# Altium PCB PCB1.PcbDoc (part 1 of 2)
Units mil, origin at the board's own origin, x right, y up, seen from the top; angles counter-clockwise.
Board outline 5905 x 3937 mil, 2 copper layers (Top Layer, Bottom Layer); 159 components, 155 nets, 616 pads, 9 vias.
Unrouted connection lines stored in the file: 401.
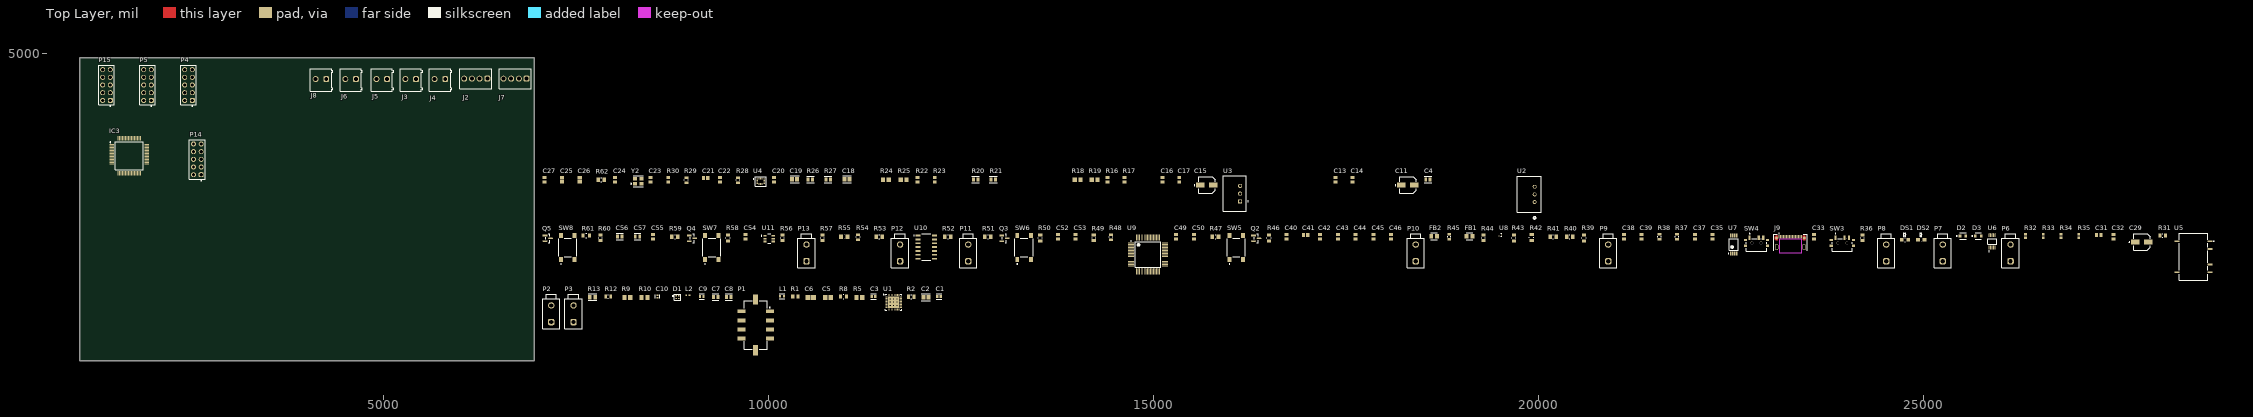
[diagram p0: Top Layer view]
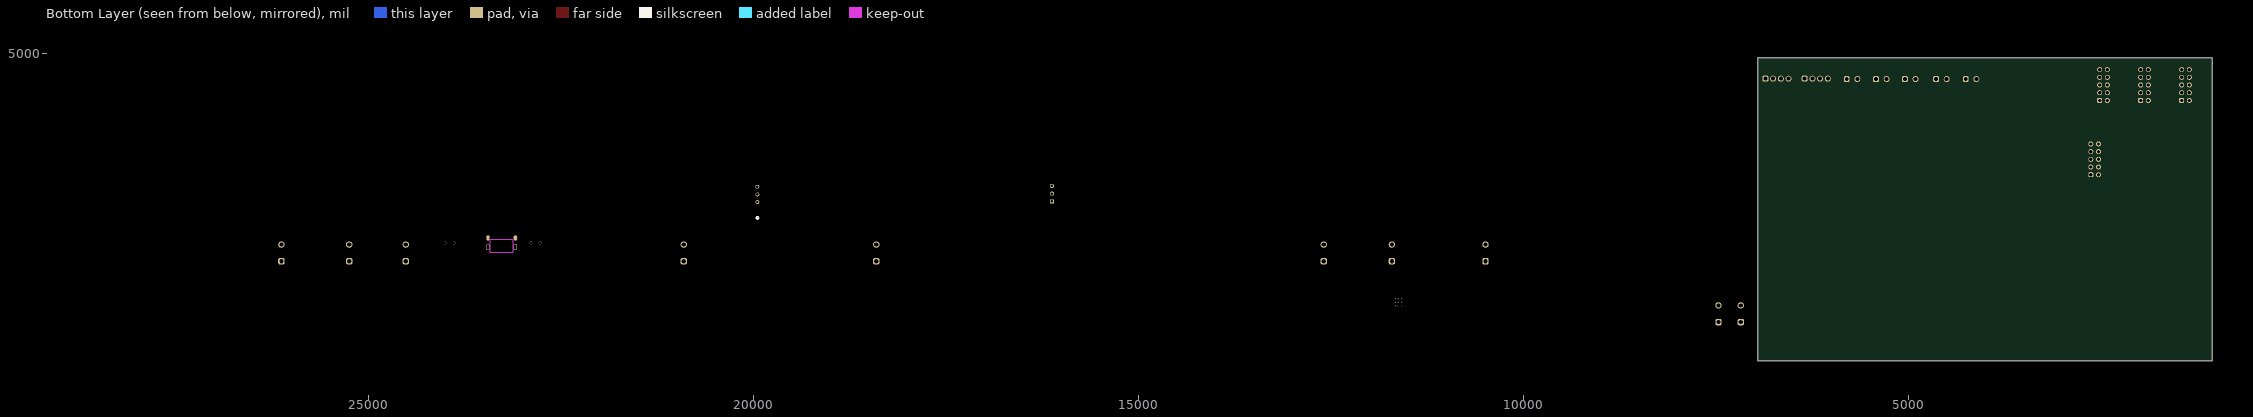
[diagram p1: Bottom Layer view, seen from below]

## Layer stack, top to bottom
Top Solder: solder mask 0.4, Solder Resist, Dk 3.5
Top Layer: signal copper 1.4
Dielectric 1: dielectric 12.6, FR-4, Dk 4.8
Bottom Layer: signal copper 1.4
Bottom Solder: solder mask 0.4, Solder Resist, Dk 3.5

## Board outline
1050,1010 1050,4947 6955,4947 6955,1010

## Design rules (kind name [scope] priority, off if disabled: settings)
Clearance [All] p1: gap=10 ignorepadtopadclearanceinfootprint=FALSE
PolygonConnect [All] p1: connectstyle=Relief reliefconductorwidth=10 reliefentries=4 polygonreliefangle="90 Angle" airgapwidth=10
RoutingVias [All] p1: holewidth=28 width=50 viastyle="Through Hole" minholewidth=28 minwidth=50 maxholewidth=28 maxwidth=50
SolderMaskExpansion [All] p1: expansion=4 istentingtop=FALSE
SupplyNets "Schematic Supply Nets_7" [InNet('5VBUS')] p1: voltage=0.000
SupplyNets "Schematic Supply Nets_6" [InNet('+12V')] p2: voltage=0.000
SupplyNets "Schematic Supply Nets_5" [InNet('VCORE')] p3: voltage=0.000
SupplyNets "Schematic Supply Nets_4" [InNet('3V3BUS')] p4: voltage=0.000
SupplyNets "Schematic Supply Nets_3" [InNet('+5V')] p5: voltage=0.000
SupplyNets "Schematic Supply Nets_2" [InNet('+3V3')] p6: voltage=0.000
SupplyNets "Schematic Supply Nets_1" [InNet('3V3AKKU')] p7: voltage=0.000
SupplyNets "Schematic Supply Nets" [InNet('GND')] p8: voltage=0.000
Width [All] p1: maxlimit=10 minlimit=10 preferedwidth=10
30 further rules are at their usual default settings.

## Classes and differential pairs
component class stm32_schematic: C4 C11 C12 C13 C14 C15 C16 C17 C18 C19 C20 C21 C22 C23 C24 C25 C26 C27 IC3 J2 J3 J4 J5 J6 J7 J8 P4 P5 P14 P15 R16 R17 R18 R19 R20 R21 R22 R23 R24 R25 R26 R27 R28 R29 R30 R62 U2 U3 U4 Y2
component class PCB_USB_UART: C29 C30 C31 C32 C33 C34 C35 C36 C37 C38 C39 C40 C41 C42 C43 C44 C45 C46 C47 C48 C49 C50 C51 C52 C53 C54 C55 C56 C57 D2 D3 DS1 DS2 FB1 FB2 J9 P6 P7 P8 P9 P10 P11 P12 P13 Q2 Q3 Q4 Q5 R31 R32 R33 R34 R35 R36 R37 R38 R39 R40 R41 R42 R43 R44 R45 R46 R47 R48 R49 R50 R51 R52 R53 R54 R55 R56 R57 R58 R59 R60 R61 SW3 SW4 SW5 SW6 SW7 SW8 U5 U6 U7 U8 U9 U10 U11 Y3
component class ESP8266_final: *1 C1 C2 C3 C5 C6 C7 C8 C9 C10 D1 IC1 IC2 J1 L1 L2 P1 P2 P3 Q1 R1 R2 R3 R4 R5 R6 R7 R8 R9 R10 R11 R12 R13 R14 R15 U1 Y1

## Components (designator, comment, footprint, x,y, rotation, side; value= is the part's Value field where it differs from the comment)
C1 "C0603C100C5GACTU" FP-C0603C-CF-MFG 12210,1845 r0 top value="10 pF"
C2 "08051C104KAT2A" FP-0805-L_2_01_0_2-W_1_25-IPC_B 12040,1835 r0 top
C3 "C0603C100C5GACTU" FP-C0603C-CF-MFG 11360,1845 r0 top value="10 pF"
C4 "GRM21BR61C106KE15L" FP-GRM21B-0_1-IPC_C 18560,3365 r0 top
C5 "C0805C105K5RACTU" CAPC2013X140X50ML20T25 10770,1830 r0 top
C6 "C0805C105K5RACTU" CAPC2013X140X50ML20T25 10545,1830 r0 top
C7 "C0805C106K8PACTU" FP-C0805C-DG-MFG 9310,1835 r0 top value=10uF
C8 "C0805C104J8RACTU" FP-C0805C-DN-MFG 9480,1835 r0 top value="0.10 μF"
C9 "C0603C829C5GACTU" FP-C0603C-CF-MFG 9130,1845 r0 top value="8.2 pF"
C10 "CBR04C249B5GAC" FP-CBR04C-MFG 8555,1845 r90 top value="2.4 pF"
C11 "EEEFK1C470UR" FP-FKC-MFG 18300,3290 r0 top
C13 "Capacitor 100 nF +/-10% 50 V 0805" CAPC2013X95X50LL10T25 17360,3360 r90 top value=100nF
C14 "Capacitor 100 nF +/-10% 50 V 0805" CAPC2013X95X50LL10T25 17580,3360 r90 top value=100nF
C15 "EEEFK1C470UR" FP-FKC-MFG 15690,3290 r0 top
C16 "Capacitor 100 nF +/-10% 50 V 0805" CAPC2013X95X50LL10T25 15110,3360 r90 top value=100nF
C17 "Capacitor 100 nF +/-10% 50 V 0805" CAPC2013X95X50LL10T25 15330,3360 r90 top value=100nF
C18 "0805ZD225KAT2A" FP-0805-L_2_01_0_2-W_1_25-IPC_B 11015,3365 r0 top
C19 "0805ZD225KAT2A" FP-0805-L_2_01_0_2-W_1_25-IPC_B 10335,3365 r0 top
C20 "Capacitor 100 nF +/-10% 50 V 0805" CAPC2013X95X50LL10T25 10065,3360 r90 top value=100nF
C21 "Capacitor 100 nF +/-10% 50 V 0805" CAPC2013X95X50LL10T25 9180,3380 r0 top value=100nF
C22 "Capacitor 100 nF +/-10% 50 V 0805" CAPC2013X95X50LL10T25 9365,3360 r90 top value=100nF
C23 "Capacitor 100 nF +/-10% 50 V 0805" CAPC2013X95X50LL10T25 8465,3360 r90 top value=100nF
C24 "Capacitor 100 nF +/-10% 50 V 0805" CAPC2013X95X50LL10T25 8005,3360 r90 top value=100nF
C25 "08055A150JAT2A" CAPC2013X140X50LL20T25 7315,3360 r90 top
C26 "08055A150JAT2A" CAPC2013X140X50LL20T25 7545,3360 r90 top
C27 "Capacitor 100 nF +/-10% 50 V 0805" CAPC2013X95X50LL10T25 7085,3360 r90 top value=100nF
C29 "EEEFK1C470UR" FP-FKC-MFG 27830,2550 r0 top
C31 "Capacitor 100 nF +/-10% 50 V 0805" CAPC2013X95X50LL10T25 27270,2640 r0 top value=100nF
C32 "Capacitor 100 nF +/-10% 50 V 0805" CAPC2013X95X50LL10T25 27460,2620 r90 top value=100nF
C33 "Capacitor 100 nF +/-10% 50 V 0805" CAPC2013X95X50LL10T25 23570,2620 r90 top value=100nF
C35 "Capacitor 100 nF +/-10% 50 V 0805" CAPC2013X95X50LL10T25 22255,2620 r90 top value=100nF
C37 "Capacitor 100 nF +/-10% 50 V 0805" CAPC2013X95X50LL10T25 22025,2620 r90 top value=100nF
C38 "Capacitor 100 nF +/-10% 50 V 0805" CAPC2013X95X50LL10T25 21105,2620 r90 top value=100nF
C39 "Capacitor 100 nF +/-10% 50 V 0805" CAPC2013X95X50LL10T25 21335,2620 r90 top value=100nF
C40 "Capacitor 100 nF +/-10% 50 V 0805" CAPC2013X95X50LL10T25 16720,2620 r90 top value=100nF
C41 "Capacitor 100 nF +/-10% 50 V 0805" CAPC2013X95X50LL10T25 16970,2640 r0 top value=100nF
C42 "Capacitor 100 nF +/-10% 50 V 0805" CAPC2013X95X50LL10T25 17160,2620 r90 top value=100nF
C43 "Capacitor 100 nF +/-10% 50 V 0805" CAPC2013X95X50LL10T25 17390,2620 r90 top value=100nF
C44 "Capacitor 100 nF +/-10% 50 V 0805" CAPC2013X95X50LL10T25 17620,2620 r90 top value=100nF
C45 "Capacitor 100 nF +/-10% 50 V 0805" CAPC2013X95X50LL10T25 17850,2620 r90 top value=100nF
C46 "Capacitor 100 nF +/-10% 50 V 0805" CAPC2013X95X50LL10T25 18080,2620 r90 top value=100nF
C49 "Capacitor 100 nF +/-10% 50 V 0805" CAPC2013X95X50LL10T25 15290,2620 r90 top value=100nF
C50 "Capacitor 100 nF +/-10% 50 V 0805" CAPC2013X95X50LL10T25 15520,2620 r90 top value=100nF
C52 "Capacitor 100 nF +/-10% 50 V 0805" CAPC2013X95X50LL10T25 13755,2620 r90 top value=100nF
C53 "Capacitor 100 nF +/-10% 50 V 0805" CAPC2013X95X50LL10T25 13985,2620 r90 top value=100nF
C54 "Capacitor 100 nF +/-10% 50 V 0805" CAPC2013X95X50LL10T25 9700,2620 r90 top value=100nF
C55 "Capacitor 100 nF +/-10% 50 V 0805" CAPC2013X95X50LL10T25 8495,2620 r90 top value=100nF
C56 "C0805C270J5GACTU" FP-C0805C-DN-MFG 8065,2625 r0 top value="27 pF"
C57 "C0805C270J5GACTU" FP-C0805C-DN-MFG 8295,2625 r0 top value="27 pF"
D1 "SML-LX0404SIUPGUSB" FP-SML-LX0404SIUPGUSB-MFG 8815,1835 r0 top
D2 "SML-LXT0805IW-TR" FP-SML-LXT0805IW-TR-MFG 25505,2630 r0 top
D3 "SML-LXT0805IW-TR" FP-SML-LXT0805IW-TR-MFG 25705,2630 r0 top
DS1 "SML-LXT0805GW-TR" LUMX-SML-LXT0805_V 24755,2580 r0 top
DS2 "SML-LXT0805GW-TR" LUMX-SML-LXT0805_V 24965,2580 r0 top
FB1 "HZ0805E601R-10" FP-HZ0805-MFG 19100,2625 r0 top
FB2 "HZ0805E601R-10" FP-HZ0805-MFG 18640,2625 r0 top
IC3 "STM32H7A3RIT6" QFP50P1200X1200X160-64N 1695,3670 r0 top
J2 "691210910004" 691210910004 6195,4672.72 r180 top
J3 "691214110002" 691214110002 5350,4655 r180 top
J4 "691214110002" 691214110002 5730,4655 r180 top
J5 "691214110002" 691214110002 4975,4655 r180 top
J6 "691214110002" 691214110002 4570,4655 r180 top
J7 "691210910004" 691210910004 6705,4672.72 r180 top
J8 "691214110002" 691214110002 4185,4655 r180 top
J9 "213083-0005" FP-2130830005-MFG 23265,2480 r0 top
L1 "LQW18AN4N3C00D" FP-LQW18AN_00-MFG 10170,1845 r0 top
L2 "7447840015G" WE-MK_0402_L1W0.5H0.5 8950,1860 r0 top
P1 "662008231822" 662008231822 9830,1475 r90 top
P2 "64900221122" 64900221122 7175,1620 r0 top
P3 "64900221122" 64900221122 7465,1620 r0 top
P4 "61301021121" 61301021121 2465,4590 r90 top
P5 "61301021121" 61301021121 1932.5,4590 r90 top
P6 "64900221122" 64900221122 26125,2410 r0 top
P7 "64900221122" 64900221122 25245,2410 r0 top
P8 "64900221122" 64900221122 24510,2410 r0 top
P9 "64900221122" 64900221122 20900,2410 r0 top
P10 "64900221122" 64900221122 18400,2410 r0 top
P11 "64900221122" 64900221122 12590,2410 r0 top
P12 "64900221122" 64900221122 11705,2410 r0 top
P13 "64900221122" 64900221122 10490,2410 r0 top
P14 "61301021121" 61301021121 2580,3625 r90 top
P15 "61301021121" 61301021121 1400,4590 r90 top
Q2 "BSS138" FP-318-08-IPC_B 16330,2600 r0 top
Q3 "BSS138" FP-318-08-IPC_B 13060,2600 r0 top
Q4 "BSS138" FP-318-08-IPC_B 9005,2600 r0 top
Q5 "BSS138" FP-318-08-IPC_B 7130,2600 r0 top
R1 "TNPW0805499RBEEN" RESC2013X55X40NL15T20 10345,1845 r0 top
R2 "CRCW0805200RFKEA" RESC2013X50X30NL20T20 11850,1840 r0 top
R5 "ERJ6ENF1202V" RESC2013X70X40ML20T20 11175,1830 r0 top
R8 "RN73C2A12KBTG" FP-RN732A-MFG 10970,1845 r0 top value=12KΩ
R9 "ERA6AEB101V" RESC2013X60X40ML20T25 8165,1830 r0 top
R10 "ERJ-6ENF24R9V" RESC2013X70X40ML20T20 8385,1830 r0 top
R12 "CRCW080522R0FKEA" FP-CRCW0805-e3-IPC_C 7915,1845 r0 top
R13 "ERJ-6ENF4990V" FP-ERJ6EN-IPC_B 7710,1835 r0 top
R16 "ERA-6AEB103V" RESC2013X60X40LL20T25_A 14400,3360 r90 top
R17 "ERA-6AEB103V" RESC2013X60X40LL20T25_A 14620,3360 r90 top
R18 "ERA6AEB472V" RESC2013X60X40ML20T25 14010,3360 r0 top
R19 "ERA6AEB472V" RESC2013X60X40ML20T25 14230,3360 r0 top
R20 "ERA6AEB102V" FP-ERA6A-IPC_C 12685,3365 r0 top
R21 "ERA6AEB102V" FP-ERA6A-IPC_C 12915,3365 r0 top
R22 "ERA-6AEB103V" RESC2013X60X40LL20T25_A 11930,3360 r90 top
R23 "ERA-6AEB103V" RESC2013X60X40LL20T25_A 12155,3360 r90 top
R24 "ERA6AEB472V" RESC2013X60X40ML20T25 11520,3360 r0 top
R25 "ERA6AEB472V" RESC2013X60X40ML20T25 11750,3360 r0 top
R26 "ERA6AEB102V" FP-ERA6A-IPC_C 10540,3365 r0 top
R27 "ERA6AEB102V" FP-ERA6A-IPC_C 10770,3365 r0 top
R28 "CRCW080568R0FKEA" FP-CRCW0805-e3-IPC_C 9600,3355 r90 top
R29 "CRCW080568R0FKEA" FP-CRCW0805-e3-IPC_C 8930,3355 r90 top
R30 "ERA-6AEB103V" RESC2013X60X40LL20T25_A 8695,3360 r90 top
R31 "RC0805FR-0710KL" RESC2013X60X35NL10T20 28100,2635 r0 top
R32 "ERA3AEB680V" RESC1608X55X30LL20T20 26320,2630 r90 top
R33 "ERA3AEB680V" RESC1608X55X30LL20T20 26550,2630 r90 top
R34 "ERA3AEB680V" RESC1608X55X30LL20T20 26780,2630 r90 top
R35 "ERA3AEB680V" RESC1608X55X30LL20T20 27010,2630 r90 top
R36 "RC0805FR-0710KL" RESC2013X60X35NL10T20 24200,2605 r90 top
R37 "CRCW08054K30FKEA" RESC2013X50X30LL20T20 21795,2620 r90 top
R38 "RC0805FR-07470RL" RESC2013X60X35LL10T20 21565,2620 r90 top
R39 "RN73C2A5K11BTDF" FP-RN732A-MFG 20585,2605 r90 top value=5.11KΩ
R40 "RC0805JR-070RL" RESC2013X60X35ML10T20 20400,2620 r0 top
R41 "RC0805JR-070RL" RESC2013X60X35ML10T20 20185,2620 r0 top
R42 "CRCW08051K50FKEA" FP-CRCW0805-e3-MFG 19905,2610 r90 top
R43 "RN73C2A5K11BTDF" FP-RN732A-MFG 19675,2605 r90 top value=5.11KΩ
R44 "RC0805FR-0710KL" RESC2013X60X35NL10T20 19280,2605 r90 top
R45 "RC0805FR-07470RL" RESC2013X60X35LL10T20 18835,2620 r90 top
R46 "RN73C2A100RBTDF" FP-RN732A-MFG 16495,2605 r90 top value=100Ω
R47 "RC0805JR-070RL" RESC2013X60X35ML10T20 15800,2620 r0 top
R48 "CRCW080568R0FKEA" FP-CRCW0805-e3-IPC_C 14445,2615 r90 top
R49 "RC0805FR-0710KL" RESC2013X60X35NL10T20 14220,2605 r90 top
R50 "RN73C2A100RBTDF" FP-RN732A-MFG 13525,2605 r90 top value=100Ω
R51 "RC0805FR-0710RL" RESC2013X60X35ML10T20 12845,2620 r0 top
R52 "RC0805FR-0710RL" RESC2013X60X35ML10T20 12325,2620 r0 top
R53 "RC0805FR-071KL" RESC2013X60X35ML10T20 11435,2620 r0 top
R54 "CRCW080568R0FKEA" FP-CRCW0805-e3-IPC_C 11160,2615 r90 top
R55 "CRCW080512K0FKEA" FP-CRCW0805-e3-IPC_A 10980,2620 r0 top
R56 "RC0805FR-0710KL" RESC2013X60X35NL10T20 10180,2605 r90 top
R57 "RC0805FR-0710KL" RESC2013X60X35NL10T20 10700,2605 r90 top
R58 "RN73C2A100RBTDF" FP-RN732A-MFG 9470,2605 r90 top value=100Ω
R59 "RC0805JR-072KL" RESC2013X60X35ML10T20 8780,2620 r0 top
R60 "RC0805FR-0710KL" RESC2013X60X35NL10T20 7815,2605 r90 top
R61 "RN73C2A100RBTDF" FP-RN732A-MFG 7630,2635 r0 top value=100Ω
R62 "Resistor 0R +/- 5% 0805 125 mW" RESC2013X60X35ML10T20 7825,3360 r0 top value=0
SW3 "PCM12SMTR" FP-PCM12SMTR-MFG 23940,2510 r0 top
SW4 "PCM12SMTR" FP-PCM12SMTR-MFG 22825,2510 r0 top
SW5 "PTS645SM43SMTR92LFS" FP-PTS645SM43SMTR92LFS-MFG 16070,2480 r90 top
SW6 "PTS645SM43SMTR92LFS" FP-PTS645SM43SMTR92LFS-MFG 13315,2480 r90 top
SW7 "PTS645SM43SMTR92LFS" FP-PTS645SM43SMTR92LFS-MFG 9260,2480 r90 top
SW8 "PTS645SM43SMTR92LFS" FP-PTS645SM43SMTR92LFS-MFG 7390,2480 r90 top
U1 "ESP8266EX" ESFS-QFN-32_L 11620,1770 r0 top
U2 "TSR 1-2433" TSR1-SINGLE_TRP 19945,3070 r90 top
U3 "TSR 1-2450" TRACO-SIP-3_V 16120,3180 r90 top
U4 "LSM6DSOXTR" FP-LGA-14L-DM00249496-MFG 9895,3340 r0 top
U5 "TSRN 1-2433SM" TSR(N 28500,2360 r0 top
U6 "TS5A23157DGSR" FP-DGS0010A-IPC_C 25885,2560 r90 top
U7 "TPS2113APW" PW0008A_N 22530,2520 r90 top
U8 "TPD2EUSB30DRTR" DRT0003A 19500,2645 r0 top
U9 "FT2232HL-Reel" LQFP-64_M 14925,2390 r0 top
U10 "SN74LVC14AD" FP-D0014A-MFG 12045,2485 r0 top
U11 "93LC56BT-I/OT" FP-C04-028-MFG 10005,2595 r0 top
Y2 "ABM8AIG-24.000MHZ-12-2Z-T3" FP-ABM8AIG-MFG 8305,3340 r0 top

## Footprints (in the part's own frame and the unit in brackets; to place one, negate y for a bottom-side part, rotate by r counter-clockwise, add the part's x,y. Pads: shape width x height; smd on the part's side, far side on the other; paste and mask are expansions set on the pad)
61301021121 [mm] "Pin Header, pitch 2.54 mm, THT, Vertical, dual row, 10p"
  rrect50% 1.65x1.65 hole 1.1: 1(-5.08,-1.27)
  round 1.65 hole 1.1: 2(-5.08,1.27) 3(-2.54,-1.27) 4(-2.54,1.27) 5(0,-1.27) 6(0,1.27) 7(2.54,-1.27) 8(2.54,1.27) 9(5.08,-1.27) 10(5.08,1.27)
  silkscreen extent -7.08,-2.62 6.5,2.62, body extent -6.35,-2.54 6.35,2.54, height 8.59
64900221122 [mm] "4.20mm Male Dual Row Vertical Header, 2p"
  rrect50% 2.1x2.1 hole 1.4: 1(0,-2.75)
  round 2.1 hole 1.4: 2(0,2.75)
  silkscreen extent -2.85,-4.9 2.85,6.4, body extent -2.7,-4.8 3.1,6.3, height 12.85
662008231822 [mm] "3.00mm SMT Male Dual Row Vertical Header with SMT Solder Tab, 8p"
  rect 1.27x2.54 smd: 1(4.5,-4.7) 2(1.5,-4.7) 3(-1.5,-4.7) 4(-4.5,-4.7) 5(4.5,4.7) 6(1.5,4.7) 7(-1.5,4.7) 8(-4.5,4.7)
  rect 3.43x1.65 smd: MP1(-8.395,0) MP2(8.395,0)
  silkscreen extent -8,-4.75 8,3.76, body extent -10.1,-5.7 10.1,5.7, height 9.93
691210910004 [mm] "2,54mm - modular - green - Horizontal wire entry - Cage clamp - 0,8mm2 wires - 04p"
  rrect50% 1.95x1.95 hole 1.3: 1(-3.81,0)
  round 1.95 hole 1.3: 2(-1.27,0) 3(1.27,0) 4(3.81,0)
  silkscreen extent -5.28,-3.25 5.28,3.25, body extent -5.28,-3.25 5.28,3.25, height 8.55
691214110002 [mm] "3.50 mm Horizontal Entry Modular, 2p"
  rrect50% 1.95x1.95 hole 1.3: 1(-1.75,-0.3)
  round 1.95 hole 1.3: 2(1.75,-0.3)
  silkscreen extent -3.9,-3.7 3.5,3.7, body extent -3.95,-3.7 3.5,3.7, height 8.55
CAPC2013X95X50LL10T25 [mm] "Chip Capacitor, 2-Leads, Body 2.10x1.35mm, IPC High Density"
  rect 1.05x1.3 smd: 1(-0.725,0) 2(0.725,0)
  body extent -1.05,-0.67 1.05,0.67, height 0.95
CAPC2013X140X50LL20T25 [mm] "Chip Capacitor, 2-Leads, Body 2.00x1.25mm, IPC High Density"
  rect 1.1x1.35 smd: 1(-0.7,0) 2(0.7,0)
  body extent -1.1,-0.72 1.1,0.72, height 1.4
CAPC2013X140X50ML20T25 [mm] "Chip Capacitor, 2-Leads, Body 2.00x1.25mm, IPC Low Density"
  rect 1.5x1.55 smd: 1(-0.9,0) 2(0.9,0)
  body extent -1.1,-0.72 1.1,0.72, height 1.4
DRT0003A [mm] "SOTFL, 3-Leads, Body 1x1mm (inc leads), Pitch 0.35mm"
  rrect33% 0.3x0.3 smd: 1(-0.425,0.35) 2(-0.425,-0.35) 3(0.425,0)
  silkscreen extent 0.13,-0.55 0.43,0.55, body extent -0.5,-0.5 0.5,0.5, height 0.5
ESFS-QFN-32_L [mm] "QFN, 32-Leads, Body 5.05x5.05mm, Pitch 0.50mm, Thermal Pad 3.70x3.70mm, IPC High Density"
  oval 0.7x0.25 smd: 1(-2.375,1.75) 2(-2.375,1.25) 3(-2.375,0.75) 4(-2.375,0.25) 5(-2.375,-0.25) 6(-2.375,-0.75) 7(-2.375,-1.25) 8(-2.375,-1.75) 17(2.375,-1.75) 18(2.375,-1.25) 19(2.375,-0.75) 20(2.375,-0.25) 21(2.375,0.25) 22(2.375,0.75) 23(2.375,1.25) 24(2.375,1.75)
  oval 0.25x0.7 smd: 9(-1.75,-2.375) 10(-1.25,-2.375) 11(-0.75,-2.375) 12(-0.25,-2.375) 13(0.25,-2.375) 14(0.75,-2.375) 15(1.25,-2.375) 16(1.75,-2.375) 25(1.75,2.375) 26(1.25,2.375) 27(0.75,2.375) 28(0.25,2.375) 29(-0.25,2.375) 30(-0.75,2.375) 31(-1.25,2.375) 32(-1.75,2.375)
  rect 3.7x3.7 smd: 33(0,0)
  silkscreen extent -3.45,-2.67 2.68,2.68, body extent -2.52,-2.52 2.53,2.53, height 0.9
FP-318-08-IPC_B [mm]
  rect 1.524x0.578 smd paste+0 mask+0: 1(-0.91,0.95)
  rrect100% 1.524x0.578 smd paste+0 mask+0: 2(-0.91,-0.95) 3(0.91,0)
  silkscreen extent -0.65,-1.45 0.65,1.45, body extent -1.92,-1.7 1.92,1.7, height 0.25
FP-0805-L_2_01_0_2-W_1_25-IPC_B [mil]
  rect 51.36x57.33 smd paste+0 mask+0: 1(-31.72,0) 2(31.72,0)
  silkscreen extent -57,-44 57,44, body extent -67,-39 67,39, height 10
FP-2130830005-MFG [mm]
  round 0.9 smd paste-1000 mask+0: 1(-4.57,3.15) 2(4.57,3.15)
  rrect100% 1.1x1.65 smd far side paste-1000 mask+0: 1(-4.52,3.15) 2(4.52,3.15)
  rrect100% 1.1x2.05 hole 1.55 slot 0.6 at 0 deg paste-2539.97 mask+0: 3(-4.52,0.15) 4(4.52,0.15)
  rect 0.3x1 smd paste+0 mask+0: A1(-3.75,3.55) A4(-2.75,3.55) A5(-1.75,3.55) A6(-0.75,3.55) A7(0.75,3.55) A8(1.75,3.55) A9(2.75,3.55) A12(3.75,3.55) B1(3.25,3.55) B4(2.25,3.55) B5(1.25,3.55) B6(0.25,3.55) B7(-0.25,3.55) B8(-1.25,3.55) B9(-2.25,3.55) B12(-3.25,3.55)
  Top Layer region: 5.07,3.425 5.001,3.691 4.812,3.891 4.549,3.974 4.28,3.919 4.07,3.741 4.07,3.741 4.07,2.559 4.28,2.381 4.549,2.326 4.812,2.409 5.001,2.609 5.07,2.875 5.07,2.875
  Top Layer region: -5.07,3.425 -5.001,3.691 -4.812,3.891 -4.549,3.974 -4.28,3.919 -4.07,3.741 -4.07,3.741 -4.07,2.559 -4.28,2.381 -4.549,2.326 -4.812,2.409 -5.001,2.609 -5.07,2.875 -5.07,2.875
  Keep-Out Layer region: -3.7,-1.745 3.7,-1.745 3.7,2.755 -3.7,2.755
  silkscreen extent -5.53,-1.07 5.53,4.75, body extent -5.33,-4.18 5.33,4.18, height 0.25
FP-ABM8AIG-MFG [mm]
  rect 1.4x1.2 smd paste+0 mask+0: 1(-1.1,-0.8) 2(1.1,-0.8) 3(1.1,0.8) 4(-1.1,0.8)
  silkscreen extent -2.47,-1.8 1.65,1.8, body extent -1.9,-1.5 1.9,1.5, height 0.25
FP-C04-028-MFG [mm]
  rect 1.1x0.6 smd paste+0 mask+0: 1(-1.4,0.95) 2(-1.4,0) 3(-1.4,-0.95) 4(1.4,-0.95) 5(1.4,0) 6(1.4,0.95)
  silkscreen extent -2.65,-1.55 0.48,1.55, body extent -2.05,-1.88 2.05,1.88, height 0.25
FP-C0603C-CF-MFG [mm]
  rect 0.75x0.9 smd paste+0 mask+0: 1(-0.6,0) 2(0.6,0)
  silkscreen extent -0.87,-0.85 0.88,0.85, body extent -1.2,-0.6 1.2,0.6, height 0.25
FP-C0805C-DG-MFG [mm]
  rect 0.95x1.35 smd paste+0 mask+0: 1(-0.75,0) 2(0.75,0)
  silkscreen extent -1.11,-1.08 1.1,1.07, body extent -1.4,-0.85 1.4,0.85, height 0.25
FP-C0805C-DN-MFG [mm]
  rect 0.95x1.35 smd paste+0 mask+0: 1(-0.75,0) 2(0.75,0)
  silkscreen extent -1.1,-1.07 1.1,1.07, body extent -1.4,-0.85 1.4,0.85, height 0.25
FP-CBR04C-MFG [mm]
  rect 0.52x0.52 smd paste+0 mask+0: 1(-0.4,0) 2(0.4,0)
  silkscreen extent -0.53,-0.68 0.53,0.67, body extent -0.8,-0.4 0.8,0.4, height 0.25
FP-CRCW0805-e3-IPC_A [mil]
  rect 47.5x59.38 smd paste+0 mask+0: 1(-41.37,0) 2(41.37,0)
  silkscreen extent -3,-25 3,25, body extent -85,-49 85,49, height 10
FP-CRCW0805-e3-IPC_C [mil]
  rect 31.75x51.5 smd paste+0 mask+0: 1(-33.5,0) 2(33.5,0)
  silkscreen extent -3,-25 3,25, body extent -53,-31 53,31, height 10
FP-CRCW0805-e3-MFG [mm]
  rect 0.95x1.45 smd paste+0 mask+0: 1(-0.975,0) 2(0.975,0)
  silkscreen extent -0.13,-0.7 0.13,0.7, body extent -1.55,-0.82 1.55,0.82, height 0.25
FP-D0014A-MFG [mm]
  rect 1.55x0.6 smd paste-1000 mask+0: 1(-2.7,3.81) 2(-2.7,2.54) 3(-2.7,1.27) 4(-2.7,0) 5(-2.7,-1.27) 6(-2.7,-2.54) 7(-2.7,-3.81) 8(2.7,-3.81) 9(2.7,-2.54) 10(2.7,-1.27) 11(2.7,0) 12(2.7,1.27) 13(2.7,2.54) 14(2.7,3.81)
  silkscreen extent -4.15,-4.38 1.55,4.38, body extent -3.57,-4.62 3.57,4.62, height 0.25
FP-DGS0010A-IPC_C [mm]
  rect 1.257x0.312 smd paste+0 mask+0: 1(-2.051,1)
  rrect100% 1.257x0.312 smd paste+0 mask+0: 2(-2.051,0.5) 3(-2.051,0) 4(-2.051,-0.5) 5(-2.051,-1) 6(2.051,-1) 7(2.051,-0.5) 8(2.051,0) 9(2.051,0.5) 10(2.051,1)
  silkscreen extent -3.38,-1.5 0.92,1.5
FP-ERA6A-IPC_C [mil]
  rect 39.55x49.69 smd paste+0 mask+0: 1(-29.56,0) 2(29.56,0)
  silkscreen extent -49,-42 49,42, body extent -53,-31 53,31, height 10
FP-ERJ6EN-IPC_B [mil]
  rect 45.47x53.63 smd paste+0 mask+0: 1(-34.47,0) 2(34.47,0)
  silkscreen extent -57,-43 57,43
FP-FKC-MFG [mm]
  rect 2.8x1.6 smd paste+0 mask+0: 1(-2.15,0) 2(2.15,0)
  silkscreen extent -4.25,-2.75 2.76,2.75, body extent -3.8,-3 3.8,3, height 0.25
FP-GRM21B-0_1-IPC_C [mil]
  rect 37.71x49.69 smd paste+0 mask+0: 1(-28.63,0) 2(28.63,0)
  silkscreen extent -47,-42 47,42, body extent -51,-31 51,31, height 10
FP-HZ0805-MFG [mm]
  rect 1.285x1.47 smd paste+0 mask+0: 1(-0.972,0) 2(0.972,0)
  silkscreen extent -1.1,-1.15 1.1,1.15, body extent -1.72,-0.83 1.72,0.83, height 0.25
FP-LGA-14L-DM00249496-MFG [mm]
  rect 0.575x0.35 smd paste+0 mask+0: 1(-1.162,0.75) 2(-1.162,0.25) 3(-1.162,-0.25) 4(-1.162,-0.75) 8(1.162,-0.75) 9(1.162,-0.25) 10(1.162,0.25) 11(1.162,0.75)
  rect 0.35x0.575 smd paste+0 mask+0: 5(-0.5,-0.913) 6(0,-0.913) 7(0.5,-0.913) 12(0.5,0.913) 13(0,0.913) 14(-0.5,0.913)
  silkscreen extent -2.5,-1.58 1.83,1.58, body extent -2.05,-1.8 2.05,1.8, height 0.25
FP-LQW18AN_00-MFG [mm]
  rect 0.625x0.85 smd paste+0 mask+0: 1(-0.663,0) 2(0.663,0)
  silkscreen extent -0.9,-0.82 0.9,0.82, body extent -1.07,-0.6 1.07,0.6, height 0.25
FP-PCM12SMTR-MFG [mm]
  rect 0.7x1.5 smd paste+0 mask+0: 1(-2.25,2.5) 2(0.75,2.5) 3(2.25,2.5)
  rect 1x0.8 smd paste+0 mask+0: 4(-3.65,1.715) 5(3.65,1.715) 6(-3.65,-0.215) 7(3.65,-0.215)
  round 0.9 hole 0.9 unplated paste-2539.97 mask+0: ""(-1.5,0.75) ""(1.5,0.75)
  silkscreen extent -3.35,-2.05 3.35,3.95, body extent -4.25,-2.15 4.25,3.35, height 0.25
FP-PTS645SM43SMTR92LFS-MFG [mm]
  rect 1.55x1.3 smd paste+0 mask+0: 1(-3.975,2.25) 2(3.975,2.25) 3(-3.975,-2.25) 4(3.975,-2.25)
  silkscreen extent -5.52,-3 3,3, body extent -4.85,-3.1 4.85,3.1, height 0.25
FP-RN732A-MFG [mm]
  rect 1x1.35 smd paste+0 mask+0: 1(-1,0) 2(1,0)
  silkscreen extent -0.13,-0.7 0.13,0.7, body extent -1.6,-0.8 1.6,0.8, height 0.25
FP-SML-LX0404SIUPGUSB-MFG [mm]
  rect 0.45x0.45 smd paste+0 mask+0: 1(-0.425,0.425) 2(0.425,0.425) 3(0.425,-0.425) 4(-0.425,-0.425)
  silkscreen extent -1.67,-1.05 1.05,1.05, body extent -0.85,-0.85 0.85,0.85, height 0.25
FP-SML-LXT0805IW-TR-MFG [mm]
  rect 0.9x1.1 smd paste+0 mask+0: 1(-0.95,0) 2(0.95,0)
  silkscreen extent -2.1,-1 1.05,1, body extent -1.5,-0.8 1.5,0.8, height 0.25
LQFP-64_M [mm] "Thin QFP, 64-Leads, Body 10x10mm, Pitch 0.5mm, IPC Low Density"
  oval 2.1x0.3 smd: 1(-5.6,3.75) 2(-5.6,3.25) 3(-5.6,2.75) 4(-5.6,2.25) 5(-5.6,1.75) 6(-5.6,1.25) 7(-5.6,0.75) 8(-5.6,0.25) 9(-5.6,-0.25) 10(-5.6,-0.75) 11(-5.6,-1.25) 12(-5.6,-1.75) 13(-5.6,-2.25) 14(-5.6,-2.75) 15(-5.6,-3.25) 16(-5.6,-3.75) 33(5.6,-3.75) 34(5.6,-3.25) 35(5.6,-2.75) 36(5.6,-2.25) 37(5.6,-1.75) 38(5.6,-1.25) 39(5.6,-0.75) 40(5.6,-0.25) 41(5.6,0.25) 42(5.6,0.75) 43(5.6,1.25) 44(5.6,1.75) 45(5.6,2.25) 46(5.6,2.75) 47(5.6,3.25) 48(5.6,3.75)
  oval 0.3x2.1 smd: 17(-3.75,-5.6) 18(-3.25,-5.6) 19(-2.75,-5.6) 20(-2.25,-5.6) 21(-1.75,-5.6) 22(-1.25,-5.6) 23(-0.75,-5.6) 24(-0.25,-5.6) 25(0.25,-5.6) 26(0.75,-5.6) 27(1.25,-5.6) 28(1.75,-5.6) 29(2.25,-5.6) 30(2.75,-5.6) 31(3.25,-5.6) 32(3.75,-5.6) 49(3.75,5.6) 50(3.25,5.6) 51(2.75,5.6) 52(2.25,5.6) 53(1.75,5.6) 54(1.25,5.6) 55(0.75,5.6) 56(0.25,5.6) 57(-0.25,5.6) 58(-0.75,5.6) 59(-1.25,5.6) 60(-1.75,5.6) 61(-2.25,5.6) 62(-2.75,5.6) 63(-3.25,5.6) 64(-3.75,5.6)
  silkscreen extent -5.72,-4.15 4.15,4.57, body extent -5,-5 5,5, height 1.6
LUMX-SML-LXT0805_V [mm] "SMD, 2-Leads, Body 2x1.25mm"
  rect 1.2x1.2 smd: 1(-1.05,0) 2(1.05,0)
  silkscreen extent -0.41,-0.63 0.23,2.25, body extent -1,-0.63 1,0.63, height 0.8
PW0008A_N [mm] "SOP, 8-Leads, Body 4.5x3.1mm, Pitch 0.65mm, IPC Medium Density"
  rrect22% 1.4x0.45 smd: 1(-2.95,0.975) 2(-2.95,0.325) 3(-2.95,-0.325) 4(-2.95,-0.975) 5(2.95,-0.975) 6(2.95,-0.325) 7(2.95,0.325) 8(2.95,0.975)
  silkscreen extent -3.07,-1.55 1.85,1.87, body extent -3.23,-1.5 3.23,1.5, height 1.2
QFP50P1200X1200X160-64N [mm]
  rect 1.475x0.3 smd: 1(-5.738,3.75) 2(-5.738,3.25) 3(-5.738,2.75) 4(-5.738,2.25) 5(-5.738,1.75) 6(-5.738,1.25) 7(-5.738,0.75) 8(-5.738,0.25) 9(-5.738,-0.25) 10(-5.738,-0.75) 11(-5.738,-1.25) 12(-5.738,-1.75) 13(-5.738,-2.25) 14(-5.738,-2.75) 15(-5.738,-3.25) 16(-5.738,-3.75) 33(5.738,-3.75) 34(5.738,-3.25) 35(5.738,-2.75) 36(5.738,-2.25) 37(5.738,-1.75) 38(5.738,-1.25) 39(5.738,-0.75) 40(5.738,-0.25) 41(5.738,0.25) 42(5.738,0.75) 43(5.738,1.25) 44(5.738,1.75) 45(5.738,2.25) 46(5.738,2.75) 47(5.738,3.25) 48(5.738,3.75)
  rect 0.3x1.475 smd: 17(-3.75,-5.738) 18(-3.25,-5.738) 19(-2.75,-5.738) 20(-2.25,-5.738) 21(-1.75,-5.738) 22(-1.25,-5.738) 23(-0.75,-5.738) 24(-0.25,-5.738) 25(0.25,-5.738) 26(0.75,-5.738) 27(1.25,-5.738) 28(1.75,-5.738) 29(2.25,-5.738) 30(2.75,-5.738) 31(3.25,-5.738) 32(3.75,-5.738) 49(3.75,5.738) 50(3.25,5.738) 51(2.75,5.738) 52(2.25,5.738) 53(1.75,5.738) 54(1.25,5.738) 55(0.75,5.738) 56(0.25,5.738) 57(-0.25,5.738) 58(-0.75,5.738) 59(-1.25,5.738) 60(-1.75,5.738) 61(-2.25,5.738) 62(-2.75,5.738) 63(-3.25,5.738) 64(-3.75,5.738)
  silkscreen extent -6.35,-4.65 4.65,4.65, body extent -6,-6 6,6, height 1.6
RESC1608X55X30LL20T20 [mm] "Chip Resistor, 2-Leads, Body 1.60x0.80mm, IPC High Density"
  rect 0.8x0.9 smd: 1(-0.6,0) 2(0.6,0)
  body extent -0.9,-0.5 0.9,0.5, height 0.55
RESC2013X50X30LL20T20 [mm] "Chip Resistor, 2-Leads, Body 2.00x1.25mm, IPC High Density"
  rect 0.85x1.35 smd: 1(-0.825,0) 2(0.825,0)
  silkscreen extent -0.1,-0.58 0.1,0.58, body extent -1.1,-0.72 1.1,0.72, height 0.5
RESC2013X50X30NL20T20 [mm] "Chip Resistor, 2-Leads, Body 2.00x1.25mm, IPC Medium Density"
  rect 1.05x1.45 smd: 1(-0.925,0) 2(0.925,0)
  silkscreen extent -0.1,-0.63 0.1,0.63, body extent -1.1,-0.72 1.1,0.72, height 0.5
RESC2013X55X40NL15T20 [mm] "Chip Resistor, 2-Leads, Body 2.00x1.25mm, IPC Medium Density"
  rect 1.1x1.4 smd: 1(-0.875,0) 2(0.875,0)
  body extent -1.07,-0.7 1.08,0.7, height 0.55
RESC2013X60X35LL10T20 [mm] "Chip Resistor, 2-Leads, Body 2.1x1.35mm, IPC High Density"
  rect 0.8x1.25 smd: 1(-0.8,0) 2(0.8,0)
  silkscreen extent -0.1,-0.53 0.1,0.53, body extent -1.05,-0.67 1.05,0.68, height 0.6
RESC2013X60X35ML10T20 [mm] "Chip Resistor, 2-Leads, Body 2.1x1.35mm, IPC Low Density"
  rect 1.2x1.45 smd: 1(-1,0) 2(1,0)
  silkscreen extent -0.1,-0.63 0.1,0.63, body extent -1.05,-0.68 1.05,0.67, height 0.6
RESC2013X60X35NL10T20 [mm] "Chip Resistor, 2-Leads, Body 2.1x1.35mm, IPC Medium Density"
  rect 1x1.35 smd: 1(-0.9,0) 2(0.9,0)
  silkscreen extent -0.1,-0.58 0.1,0.58, body extent -1.05,-0.68 1.05,0.67, height 0.6
RESC2013X60X40LL20T25_A [mm] "Chip Resistor, 2-Leads, Body 2.20x1.35mm, IPC High Density"
  rect 1x1.25 smd: 1(-0.75,0) 2(0.75,0)
  body extent -1.1,-0.67 1.1,0.67, height 0.6
RESC2013X60X40ML20T25 [mm] "Chip Resistor, 2-Leads, Body 2.00x1.25mm, IPC Low Density"
  rect 1.4x1.55 smd: 1(-0.95,0) 2(0.95,0)
  body extent -1.1,-0.72 1.1,0.72, height 0.6
RESC2013X70X40ML20T20 [mm] "Chip Resistor, 2-Leads, Body 2.00x1.25mm, IPC Low Density"
  rect 1.35x1.55 smd: 1(-0.975,0) 2(0.975,0)
  body extent -1.1,-0.72 1.1,0.72, height 0.7
TRACO-SIP-3_V [mm] "SIP, 3-Leads, Body 11.7x7.6mm, Pitch 2.54mm"
  rect 1.35x1.35 hole 0.85 paste-2539.97: 1(-2.54,0)
  round 1.35 hole 0.85 paste-2539.97: 2(0,0) 3(2.54,0)
  silkscreen extent -5.84,-2.77 5.86,5.6, body extent -5.84,-2 5.86,5.6, height 10.2
TSR1-SINGLE_TRP [mil]
  round 50 / inner round 60 / far side round 50 hole 30 paste-99999 mask+0: 1(0,0) 2(100,0) 3(200,0)
  silkscreen extent -220,-85 335,225
TSR(N [mil]
  rect 67x22 smd paste+0 mask+0: 1(-213,200) 5(-213,-200) 6(213,-200) 7(213,-100) 9(213,100) 10(213,200)
  silkscreen extent -188,-304 266,304, body extent -233,-299 233,299, height 299
WE-MK_0402_L1W0.5H0.5 [mm] "SMD Multilayer Ceramic Inductor, body 1.00x0.50mm"
  rect 0.6x0.6 smd: 1(-0.55,0) 2(0.55,0)
  body extent -0.5,-0.25 0.5,0.25, height 0.5